# Altium PCB VS10X3.PcbDoc
Units mil, origin at the board's own origin, x right, y up, seen from the top; angles counter-clockwise.
Board outline 1310 x 1300 mil, 2 copper layers (Top Layer, Bottom Layer); 46 components, 39 nets, 144 pads, 2 vias.
Unrouted connection lines stored in the file: 61.
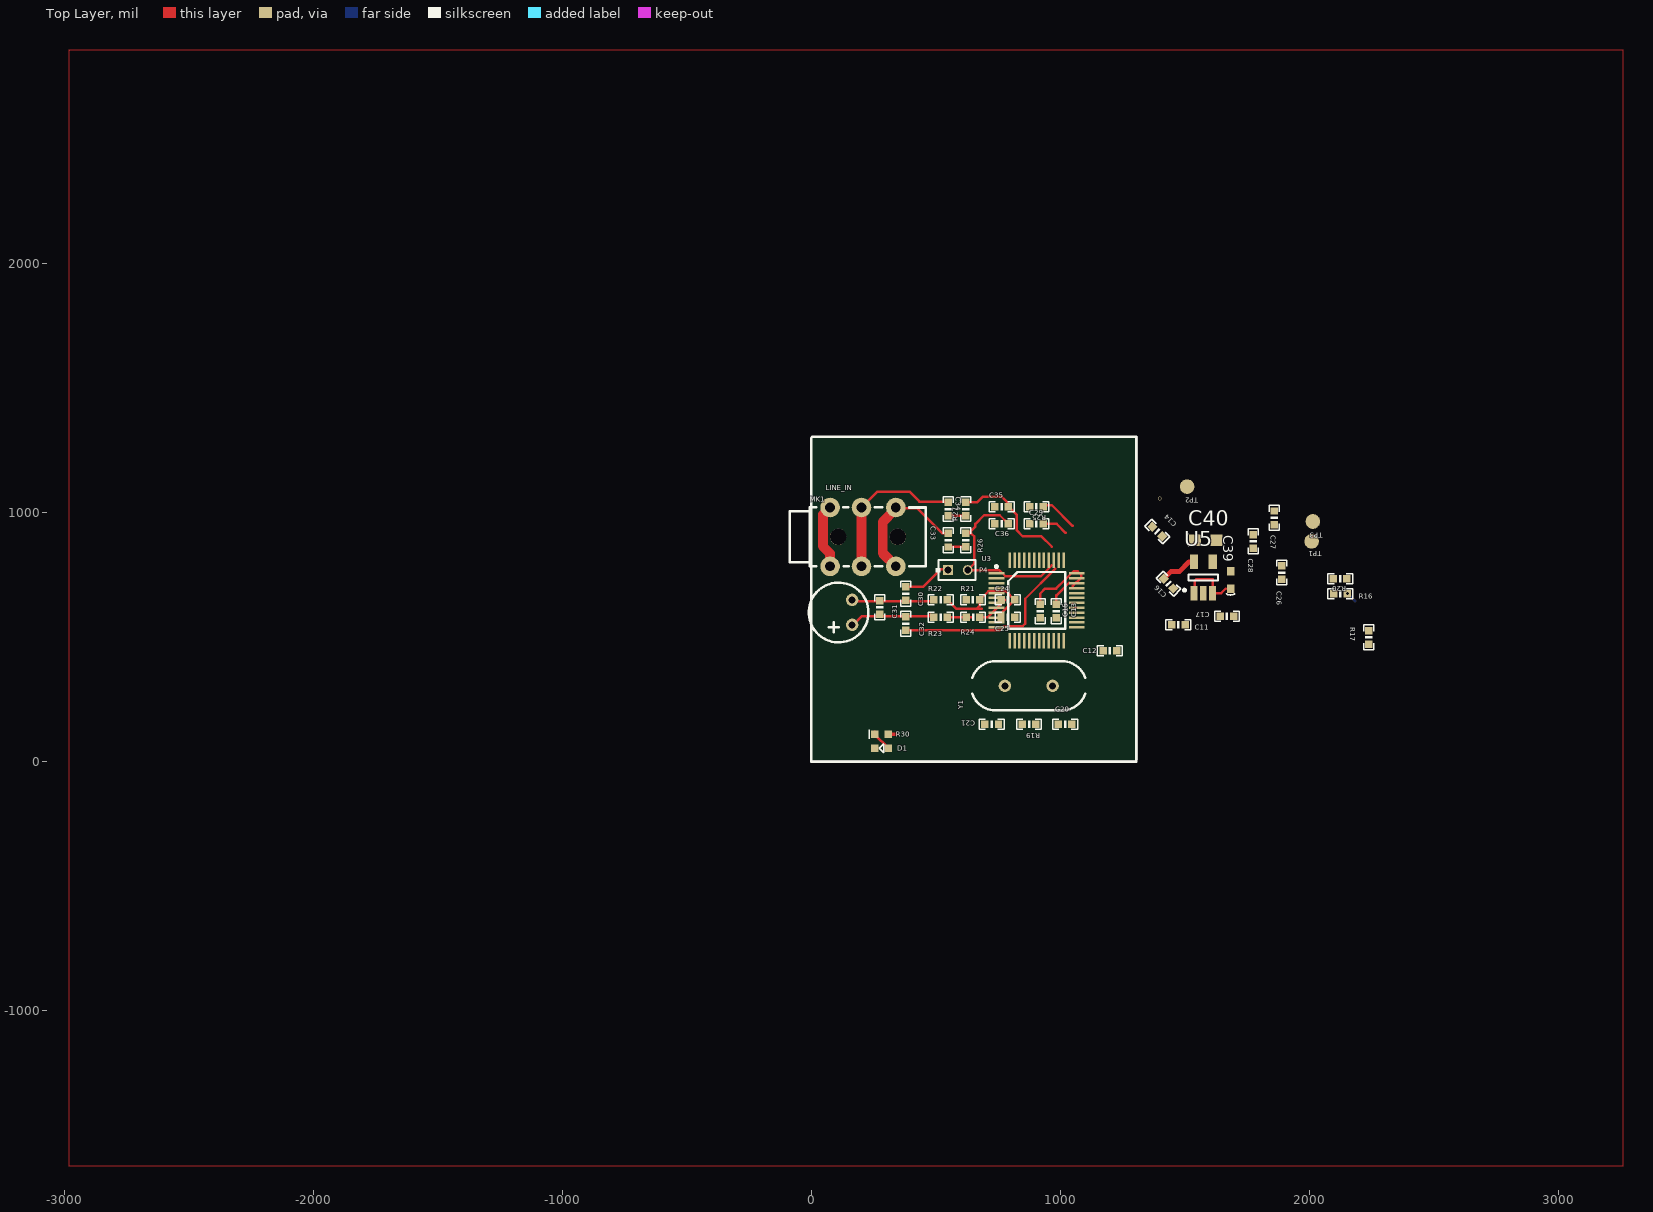
[diagram p0: Top Layer view]
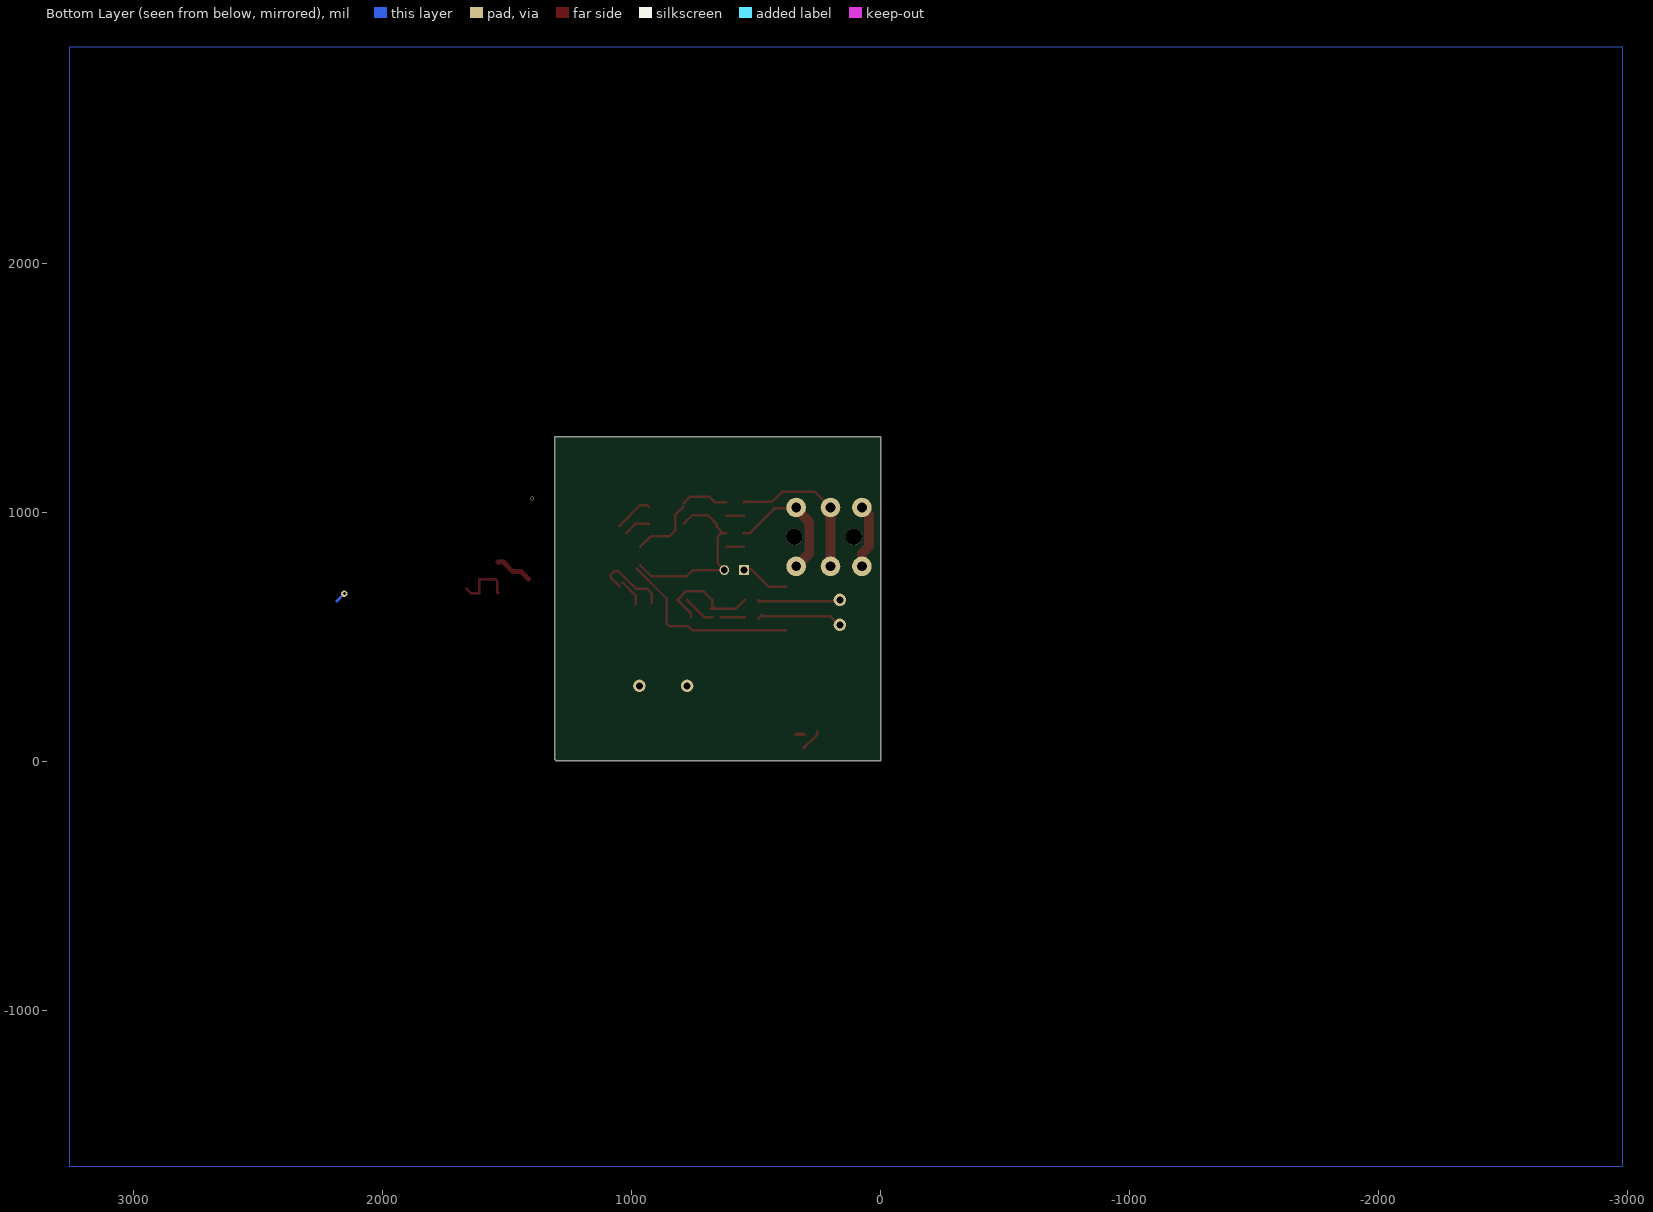
[diagram p1: Bottom Layer view, seen from below]

## Layer stack, top to bottom
Top Solder: solder mask 0.4, Solder Resist, Dk 3.5
Top Layer: signal copper 1.4
Dielectric1: dielectric 12.6, FR-4, Dk 4.8
Bottom Layer: signal copper 1.4
Bottom Solder: solder mask 0.4, Solder Resist, Dk 3.5

## Board outline
0,1305 0,5 1305,5 1310,10 1310,1305

## Design rules (kind name [scope] priority, off if disabled: settings)
Clearance [All] p1: gap=7.87
FabricationTestPointUsage TestPointUsage [All] p1: valid=0 allowmultiple=FALSE
FabricationTestpoint Testpoint [All] p1: side=3 testpointundercomponent=TRUE minsize=40 maxsize=100 preferedsize=60 minholesize=0 maxholesize=40 preferedholesize=32 testpointgrid=1 allowsidetop=TRUE allowsidebottom=TRUE usegrid=TRUE gridtolerance=0.01
PolygonConnect [All] p1: connectstyle=Relief reliefconductorwidth=10 reliefentries=4 polygonreliefangle="90 Angle" airgapwidth=10
RoomDefinition VS10X3 [InComponentClass('VS10X3')] p1: confinementstyle=ConfineIn formatcopy=TRUE lockcomponents=FALSE outline 1310,1310 -105,1310 -105,-5 1310,-5
RoutingVias [All] p1: holewidth=12 width=25 viastyle="Through Hole" minholewidth=10 minwidth=25 maxholewidth=28 maxwidth=50
SilkToSolderMaskClearance SilkscreenOverComponentPads [IsPad] p1: minsilkscreentomaskgap=10 clearancetoexposedcopper=TRUE
SolderMaskExpansion [All] p1: expansion=4
Width [All] p1: maxlimit=78.74 minlimit=10 preferedwidth=10
27 further rules are at their usual default settings.

## Components (designator, comment, footprint, x,y, rotation, side; value= is the part's Value field where it differs from the comment)
C11 "104" 0603P 1475,550 r180 top
C12 "104" 0603P 1200,445 r180 top
C13 "104" 0603P 985,605 r90 top
C14 "104" 0603P 1390,925 r315 top
C15 "104" 0603P 920,605 r90 top
C16 "104" 0603P 1435,715 r135 top
C17 "104" 0603P 1670,585 r180 top
C20 "22" 0603P 1020,150 r180 top
C21 "22" 0603P 725,150 r0 top
C24 "10UF" 0603P 790,650 r0 top
C25 "10UF" 0603P 790,580 r180 top
C26 "104" 0603P 1890,760 r270 top
C27 "104" 0603P 1860,980 r270 top
C28 "104" 0603P 1775,885 r270 top
C29 "1UF" 0603P 905,955 r180 top
C30 "1UF" 0603P 380,675 r90 top
C31 "1UF" 0603P 275,620 r90 top
C32 "1UF" 0603P 380,555 r270 top
C33 "1UF" 0603P 550,890 r270 top
C34 "1UF" 0603P 550,1015 r270 top
C35 "103" 0603P 765,1025 r0 top
C36 "103" 0603P 765,955 r0 top
C39 "100nF" C0603L 1685,730 r90 top
C40 "10uF" C0805 1585,890 r0 top
D1 "RED" 0603pn 310,55 r180 top
LINE_IN "LINE_IN" PHONE_ST 208.11,903.11 r180 top
MK1 "Mic2" Mic-6050 110,600 r90 top
P4 "MIC/LINE" HDR1X2/2.00MM 550,770 r0 top
R16 "0R" 0603P 2125,675 r0 top
R17 "100K" 0603P 2240,500 r270 top
R19 "1M" 0603P 875,150 r180 top
R20 "100K" 0603P 2125,735 r180 top
R21 "1K" 0603P 650,650 r180 top
R22 "1K" 0603P 520,650 r0 top
R23 "1K" 0603P 520,580 r180 top
R24 "1K" 0603P 650,580 r180 top
R25 "1K" 0603P 905,1025 r0 top
R26 "510" 0603P 620,890 r90 top
R27 "510" 0603P 620,1015 r90 top
R30 "1K" 0603M 255,110 r0 top
TP1 "TEST POINT" TP-1.5 2010,885 r180 top
TP2 "TEST POINT" TP-1.5 1510,1105 r270 top
TP3 "TEST POINT" TP-1.5 2015,965 r270 top
U3 "VS1053B/VS1003B" mTQFP48 910.46,705 r0 top
U5 "LDO-2.5" SOT23-5 1575,740 r90 top
Y1 "12.288MHz" XTAL_US 970,305 r180 top

## Footprints (in the part's own frame and the unit in brackets; to place one, negate y for a bottom-side part, rotate by r counter-clockwise, add the part's x,y. Pads: shape width x height; smd on the part's side, far side on the other; paste and mask are expansions set on the pad)
0603M [mil]
  rect 30x30 smd: 1(0,0) 2(55,0)
  silkscreen extent -21,-17 -21,18, body extent -5,-15 60,15, height 43
0603P [mil]
  rect 30x30 smd: 1(-27,0) 2(27.5,-0.06)
  silkscreen extent -50,-20 50,20
0603pn [mil]
  rect 30x30 smd: 1(0,0) 2(55,0)
  silkscreen extent 19,-17 36,18
C0603L [mil]
  rect 35x30 smd: 1(-35,0) 2(35,0)
  silkscreen extent -60,-16 -56,18, body extent -31,-16 32,15, height 24
C0805 [mm]
  rect 1.2x1.2 smd: 1(-1.1,0) 2(1.1,0)
  silkscreen extent -1.97,-0.65 -1.8,0.65, body extent -0.99,-0.61 1.01,0.59, height 1.2
HDR1X2/2.00MM [mm] "Connector; Header; 2 Position"
  rect 1x1 hole 0.7: 1(0,0)
  round 1 hole 0.7: 2(2,0)
  silkscreen extent -1.27,-1 2.79,1
Mic-6050 [mil] "Mic 6050"
  round 50 hole 28: 1(-50,-55) 2(50,-55)
  silkscreen extent -120,-120 120,120
mTQFP48 [mm]
  rect 1.6x0.254 smd: 1(-4.223,1.3) 2(-4.223,0.8) 3(-4.223,0.3) 4(-4.223,-0.2) 5(-4.223,-0.7) 6(-4.223,-1.2) 7(-4.223,-1.7) 8(-4.223,-2.2) 9(-4.223,-2.7) 10(-4.223,-3.2) 11(-4.223,-3.7) 12(-4.223,-4.2) 25(3.977,-4.2) 26(3.977,-3.7) 27(3.977,-3.2) 28(3.977,-2.7) 29(3.977,-2.2) 30(3.977,-1.7) 31(3.977,-1.2) 32(3.977,-0.7) 33(3.977,-0.2) 34(3.977,0.3) 35(3.977,0.8) 36(3.977,1.3)
  rect 0.254x1.6 smd: 13(-2.873,-5.55) 14(-2.373,-5.55) 15(-1.873,-5.55) 16(-1.373,-5.55) 17(-0.873,-5.55) 18(-0.373,-5.55) 19(0.127,-5.55) 20(0.627,-5.55) 21(1.127,-5.55) 22(1.627,-5.55) 23(2.127,-5.55) 24(2.627,-5.55) 37(2.627,2.65) 38(2.127,2.65) 39(1.627,2.65) 40(1.127,2.65) 41(0.627,2.65) 42(0.127,2.65) 43(-0.373,2.65) 44(-0.873,2.65) 45(-1.373,2.65) 46(-1.873,2.65) 47(-2.373,2.65) 48(-2.873,2.65)
  silkscreen extent -4.35,-4.35 2.78,2.12
PHONE_ST [mm]
  round 1.676 hole 1.676: 0(-3.556,0) 0(2.54,0)
  round 2 hole 1: 1(-3.35,3) 1(-3.35,-3) 2(0.15,-3) 2(0.15,3) 3(3.35,3) 3(3.35,-3)
  silkscreen extent -6.39,-3.01 7.49,3
SOT23-5 [mm]
  rect 1.5x0.7 smd: 1(-1.595,0.95) 2(-1.595,0) 3(-1.595,-0.95)
  rect 1.5x0.85 smd: 4(1.595,-0.95) 5(1.595,0.95)
  silkscreen extent -1.42,-1.5 0.3,2.05, body extent -1.39,-1.46 1.41,1.44, height 1.09
TP-1.5 [mm]
  round 1.5 smd: 1(0,0)
XTAL_US [mil]
  round 50 hole 28: 1(0,0) 2(192.13,0)
  silkscreen extent -131,-98 323,98

## Part data
C11 C12 C13 C14 C15 C16 C17 C20 C21 C24 C25 C26 C27 C28 C29 C30 C31 C32 C33 C34 C35 C36: library part C
C39 C40: library part Cap, "Capacitor"
D1: library part LED0, "Typical INFRARED GaAs LED"
LINE_IN: library part PHONE_M
MK1: "Microphone"
P4: library part "Header 2", "Header, 2-Pin"
R16 R17 R19 R20 R21 R22 R23 R24 R25 R26 R27: library part R
R30: library part Res2, "Resistor"
TP1 TP2 TP3: library part TEST-POINT, "测试点"
U3: library part VS1053
U5: library part LDO-SOT23-5, "General LDO SOT23-5"
Y1: library part XTAL_2, "Crystal Oscillator"

## Via types
v1: diameter 25, hole 12, Top Layer to Bottom Layer, 1 vias
v2: diameter 15.75, hole 11.81, Top Layer to Bottom Layer, 1 vias

## Nets (pads, with @x,y where several pads share a name; then routed paths per layer and width w, separated by ;. In a path a pad name is that pad's centre, name@x,y a point inside that pad or via, vN(x,y) a via of type N, cw(c..) or ccw(c..) an arc to the next point about the centre after c; other vN are vias at no path point)
AGND: C24.1 C26.1 C27.1 C28.1 C29.2 C35.1 C36.1 LINE_IN.3 R24.1 U3.37 U3.40 U3.41 U3.47 | length 390
  Top Layer w10: R24.1 708,580 778,650
  Top Layer w39.37: LINE_IN.3@76.22,785 76.22,836.62 47.55,865.29 47.55,992.55 LINE_IN.3@76.22,1021.22
AVDD: C26.2 C27.2 C28.2 R21.2 U3.38 U3.43 U3.45
CVDD: C14.2 C15.2 C16.2 C17.2 C40.1 U3.5 U3.7 U3.24 U3.31 | length 455.7
  Top Layer w10: C15.2@920.06,637.5 920.06,675.06 940,695 983.97,695 1021.92,732.95 1053.97,765 1070,765 1085,750 1085,740.35 1049.76,705.11
  Top Layer w20: C16.2 1446.11,765 1480,765 1517.8,802.8 1537.6,802.8
GBUF: R25.2 TP3.1 U3.42 | length 153.6
  Top Layer w10: R25.2 937.56,1030 967.07,1030 1049.76,947.31
GND: C11.1 C12.1 C13.1 C14.1 C15.1 C16.1 C17.1 C20.1 C21.1 C39.2 C40.2 D1.2 R20.1 R25.1 U3.4 U3.16 U3.20 U3.21 U3.22 U3.35 U5.2
IOVDD: C11.2 C12.2 C13.2 R16.1 R17.2 U3.6 U3.14 U3.19 U3.32 | length 107.6
  Top Layer w10: C13.2 985.06,668.25 1035.84,719.03
LRCK: U3.36
MCLK: U3.25
"MP3 LEFT": TP1.1 U3.46
"MP3 RIGHT": TP2.1 U3.39
NetC20_2: C20.2 R19.1 U3.18 Y1.1
NetC21_2: C21.2 R19.2 U3.17 Y1.2
NetC24_2: C24.2 C25.2 R21.1 R22.2 | length 469.1
  Top Layer w10: R22.2 582.44,615 685,615 ; 665,615 677,627 R21.1 711.63,684.63 734.9,684.63 ; 719.9,684.63 720.28,685 782.44,685 C24.2 762.5,594.94 C25.2
NetC25_1: C25.1 R23.1 R24.2 | length 95.5
  Top Layer w10: R23.1 642.44,580 ; R24.2@622.44,580 R24.2
NetC29_1: C29.1 U3.44 | length 104.6
  Top Layer w10: C29.1 986.39,955 1021.92,919.47
NetC30_1: C30.1 C31.2 MK1.2 R22.1 | length 328
  Top Layer w10: MK1.2@165,645 R22.1@493,645
NetC30_2: C30.2 P4.1 | length 196.4
  Top Layer w10: C30.2 450,702.5 520,772.5 P4.1@547.5,772.5
NetC31_1: C31.1 C32.1 MK1.1 R23.2 | length 350.3
  Top Layer w10: MK1.1@165,545 205,585 R23.2@477.56,585 ; R23.2@477.56,590 R23.2@492.5,575.06
NetC32_2: C32.2 U3.2 | length 760.9
  Top Layer w10: C32.2 757.5,527.5 775,545 850,545 860,555 860,654.54 980.17,774.71
NetC33_1: C33.1 LINE_IN.1 | length 533.3
  Top Layer w10: LINE_IN.1@322.53,1017.31 427.69,1017.31 528,917 C33.1
  Top Layer w39.37: LINE_IN.1@332.71,1008.83 287.55,963.67 287.55,837.45 LINE_IN.1@340,785
NetC33_2: C33.2 R26.1 | length 70.3
  Top Layer w10: C33.2 550.44,863 R26.1
NetC34_1: C34.1 LINE_IN.2 | length 749.6
  Top Layer w10: LINE_IN.2@204.09,1023.11 265.98,1085 395,1085 435,1045 547,1045 C34.1
  Top Layer w39.37: LINE_IN.2@202.2,785 LINE_IN.2@202.2,1021.22 ; LINE_IN.2@203.11,769.09 203.11,893.11
NetC34_2: C34.2 R27.1 | length 70.3
  Top Layer w10: C34.2 619.5,987.5 R27.1
NetC35_2: C35.2 R27.2 U3.48 | length 470.2
  Top Layer w10: R27.2 667.5,1042.5 690,1065 765,1065 C35.2@792.5,1037.5 ; C35.2 825,992.44 825,930 850,905 925.04,905 966.25,863.79
NetC36_2: C36.2 P4.2 R26.2 U3.1 | length 762.3
  Top Layer w10: R26.2 R26.2@632.5,917.5 ; C36.2 757.44,990 695,990 660,955 660,945 R26.2@632.5,917.5 ; 966.25,788.63 922.62,745 780,745 755,770 P4.2 655,796.26 655,905 642.5,917.5 R26.2@632.5,917.5
NetD1_1: D1.1 R30.1 | length 87.8
  Top Layer w10: R30.1@255,120 R30.1 D1.1
NetL?_1: U5.5
NetR17_1: R17.1 U3.26
NetR20_2: R20.2 U3.33 U3.34
PVDD: C39.1 R16.2 R30.2 U5.1 U5.3 | length 314.6
  Top Layer w10: U5.1 1540,679.61 1540,725 1547.6,732.6 1612.4,732.6 U5.3 1647.2,677.2 1665,695 ; R16.2@2152.56,675 v1(2155,675)
  Top Layer w15: R30.2 340,110
  Bottom Layer w10: v1(2155,675) 2185,645
SCLK: U3.11
SDIN: U3.12
"VS DREQ": U3.8
"VS MISO": U3.30
"VS MOSI": U3.29
"VS RST": U3.3
"VS SCK": U3.28
"VS XCS": U3.23
"VS XDCS": U3.13
pads on no net: LINE_IN.0 U3.9 U3.10 U3.15 U3.27 U5.4
copper on no net:
  other v2: 1400,1058

## Polygon pours and split planes (outlines as drawn)
GND on Bottom Layer "Top Layer-No Net" (solid, shelved, pour order 1001): -2980,2870 3260,2870 3260,-1625 -2980,-1625 -2980,2870
GND on Top Layer "Top Layer-No Net" (solid, shelved, pour order 1000): -2980,2855 -2975,2860 3260,2860 3260,-1625 -2980,-1625 -2980,2860

## Silkscreen, mask and mechanical layers (free items; w line width, h text height)
Top Overlay:
  lines w10: 0,0 0,1300 ; 5,0 1305,0 1305,1300 ; 5,1305 1305,1305